# Altium PCB IF_transformer.PcbDoc
Units mm, origin at the board's own origin, x right, y up, seen from the top; angles counter-clockwise.
Board outline 50 x 24 mm, 2 copper layers (Top Layer, Bottom Layer); 9 components, 11 nets, 35 pads, 19 vias.
Unrouted connection lines stored in the file: 6.
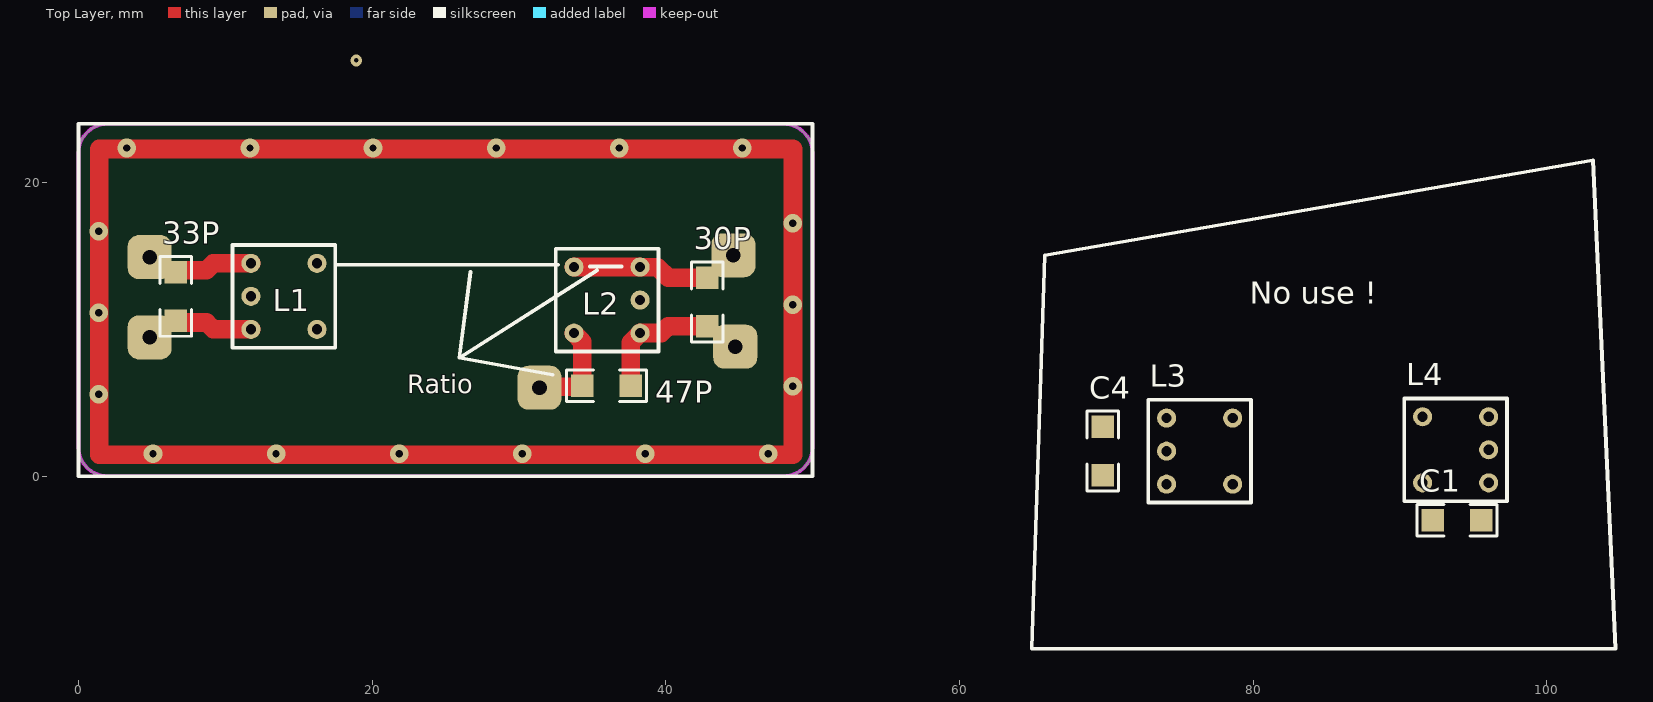
[diagram p0: Top Layer view]
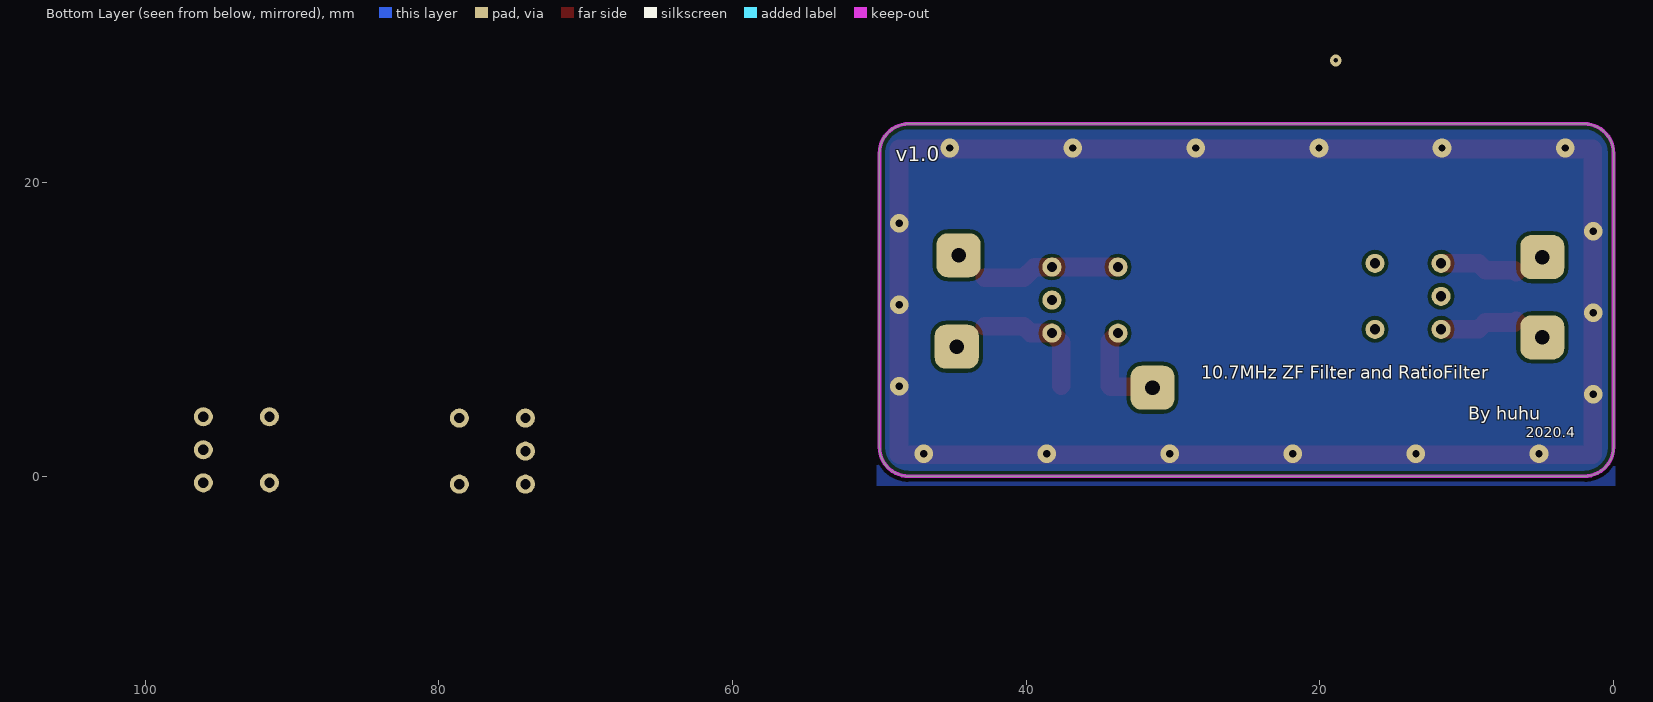
[diagram p1: Bottom Layer view, seen from below]

## Layer stack, top to bottom
Top Solder: solder mask 0.0102, Solder Resist, Dk 3.5
Top Layer: signal copper 0.0356
Dielectric 1: dielectric 0.32, FR-4, Dk 4.8
Bottom Layer: signal copper 0.0356
Bottom Solder: solder mask 0.0102, Solder Resist, Dk 3.5

## Board outline
0,2 0,22 cw(c2,22) 2,24 48,24 cw(c48,22) 50,22 50,2 cw(c48,2) 48,0 2,0 cw(c2,2)

## Design rules (kind name [scope] priority, off if disabled: settings)
Clearance [All] p1: gap=0.254 ignorepadtopadclearanceinfootprint=FALSE except(0: Arc-Hole Track-Hole SMDPad-Hole THPad-Hole Via-Hole Fill-Hole Poly-Hole Region-Hole Text-Hole)
PolygonConnect [All] p1: thpad.connectstyle=Relief thpad.reliefconductorwidth=0.254 thpad.reliefentries=4 thpad.polygonreliefangle="90 Angle" thpad.airgapwidth=0.254 smdpad.connectstyle=Relief smdpad.reliefconductorwidth=0.254 smdpad.reliefentries=4 smdpad.polygonreliefangle="90 Angle" smdpad.airgapwidth=0.254 via.connectstyle=Direct via.reliefconductorwidth=0.254 via.reliefentries=4 via.polygonreliefangle="90 Angle" via.airgapwidth=0.254
RoomDefinition IF_transformer [InComponentClass('IF_transformer')] p1: confinementstyle=ConfineIn formatcopy=TRUE lockcomponents=FALSE outline 59.466,-2.859 109.377,-2.859 109.377,7.301 59.466,7.301
RoutingVias [All] p1: holewidth=0.711 width=1.27 viastyle="Through Hole" minholewidth=0.711 minwidth=1.27 maxholewidth=0.711 maxwidth=1.27
SolderMaskExpansion [All] p1: expansion=0.102
Width [All] p1: maxlimit=1.27 minlimit=0.254 preferedwidth=0.508
30 further rules are at their usual default settings.

## Classes and differential pairs
component class IF_transformer: 30P 33P C1 C4 L1 L2 L3 L4

## Components (designator, comment, footprint, x,y, rotation, side; value= is the part's Value field where it differs from the comment)
30P "30P" "C 1206" 42.829,11.873 r90 top (schematic designator C3)
33P "33P" "C 1206" 6.634,12.254 r270 top (schematic designator C2)
47P "47P" "C 1206" 35.971,6.158 r180 top (schematic designator C1)
C1 "47P" "C 1206" 93.883,-2.986 r180 top
C4 "33P" "C 1206" 69.753,1.713 r270 top
L1 "7*7-26T" adj_L_77 14,12.254 r90 top
L2 "7*7-26T" adj_L_77 36,12 r270 top
L3 "7*7-26T&14T" adj_L_77 76.357,1.713 r90 top
L4 "7*7-12T*2" adj_L_77 93.792,1.804 r270 top

## Footprints (in the part's own frame and the unit in brackets; to place one, negate y for a bottom-side part, rotate by r counter-clockwise, add the part's x,y. Pads: shape width x height; smd on the part's side, far side on the other; paste and mask are expansions set on the pad)
adj_L_77 [mm]
  round 1.3 hole 0.7: 1(2.25,2.25) 2(0,2.25) 3(-2.25,2.25) 4(-2.25,-2.25) 5(2.25,-2.25)
  silkscreen extent -3.5,-3.5 3.5,3.5
"C 1206" [mil] "无极性贴片电容"
  rect 60x60 smd: 1(-65,0) 2(65,0)
  silkscreen extent -107,-42 107,42, body extent -63,-32 63,32, height 48

## Part data
30P 33P 47P C1 C4: library part Cap-CER-SMD, "瓷片电容-贴片"

## Free pads (board coordinates)
  rrect50% 3x3 hole 1: 0(4.856,9.46) 0(4.856,14.921) 0(31.399,6.031) 0(44.607,15.048) 0(44.734,8.825)

## Via types
v1: diameter 1.27, hole 0.5, Top Layer to Bottom Layer, 18 vias
v2: diameter 0.8, hole 0.3, Top Layer to Bottom Layer, 1 vias

## Nets (pads, with @x,y where several pads share a name; then routed paths per layer and width w, separated by ;. In a path a pad name is that pad's centre, name@x,y a point inside that pad or via, vN(x,y) a via of type N, cw(c..) or ccw(c..) an arc to the next point about the centre after c; other vN are vias at no path point)
gnd: 
  other v1: 5.08,1.524 13.462,1.524 21.844,1.524 30.226,1.524 38.608,1.524 46.99,1.524 1.397,5.588 48.641,6.138 1.397,11.134 48.641,11.684 1.397,16.679 48.641,17.23 3.302,22.352 11.684,22.352 20.066,22.352 28.448,22.352 36.83,22.352 45.212,22.352
net5: 47P.2 L2.5 pad.0@31.399,6.031 | length 6.8
  Top Layer w1.27: pad.0@31.399,6.031 31.462,6.094 34.256,6.094 47P.2 34.32,9.172 33.75,9.742 L2.5
NetC1_1: C1.1 L4.1
NetC1_2: C1.2 L4.5
NetC2_1: 33P.1 L1.1 pad.0@4.856,14.921 | length 5.4
  Top Layer w1.27: 33P.1 6.761,14.032 8.723,14.032 9.195,14.504 L1.1
NetC2_2: 33P.2 L1.3 pad.0@4.856,9.46 | length 5.4
  Top Layer w1.27: 33P.2 6.761,10.476 8.723,10.476 9.195,10.004 L1.3
NetC3_1: 30P.1 47P.1 L2.1 pad.0@44.734,8.825 | length 8.6
  Top Layer w1.27: 47P.1 37.622,9.114 38.25,9.742 L2.1 38.256,9.756 39.696,9.756 40.162,10.222 30P.1
NetC3_2: 30P.2 L2.3 L2.4 pad.0@44.607,15.048 | length 9.4
  Top Layer w1.27: L2.4 L2.3 38.256,14.244 39.442,14.244 40.162,13.524 30P.2
NetC4_1: C4.1 L3.1
NetC4_2: C4.2 L3.3
NetL3_5: L3.5 L4.3 L4.4
pads on no net: L1.2 L1.4 L1.5 L2.2 L3.2 L3.4 L4.2
copper on no net: | length 136
  Top Layer w1.27: 2.824,1.459 1.427,1.459 1.427,22.287 11.46,22.287 48.671,22.287 48.671,4.253 48.671,1.459 2.951,1.459
  other v2: 18.923,28.321

## Polygon pours and split planes (outlines as drawn)
gnd on Bottom Layer (solid, pour order 2): -0.127,-0.635 50.165,-0.635 50.165,24.13 -0.127,24.13
no net on Bottom Layer (solid, pour order 0): -2.54,29.591

## Keep-outs
Keep-Out Layer:
  the board outline again, w0.254

## Silkscreen, mask and mechanical layers (free items; w line width, h text height)
Top Overlay:
  lines w0.254: 17.683,14.413 32.669,14.413 ; 26.7,13.905 25.938,8.063 ; 32.288,6.92 25.938,8.063 ; 34.828,14.286 36.987,14.286 ; 35.336,14.032 25.938,8.063 ; 0,0 50,0 50,24 0,24 0,0 ; 64.927,-11.749 104.678,-11.749 103.154,21.525 65.816,15.048 64.927,-11.749
  text "No use !" at 79.786,11.746 h1.52
  text "Ratio" at 22.382,5.65 h1.27
Bottom Overlay:
  text "v1.0" at 48.895,21.463 h1
  text "10.7MHz ZF Filter and RatioFilter" at 28.067,6.35 h1.5
  text "By huhu" at 9.906,3.556 h1.5
  text "2020.4" at 5.969,2.413 h1.2
Top Solder:
  lines w1.27: 1.427,1.459 1.427,22.287 48.641,22.287 48.641,1.459 1.427,1.459